# Allegro board MOTOR_SENSOR.brd
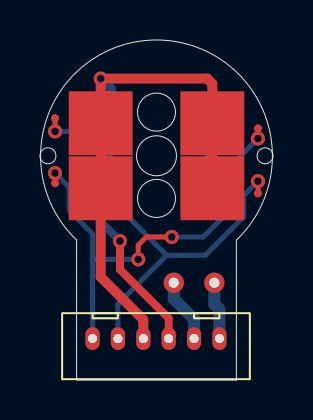
[diagram p0: board, top side]
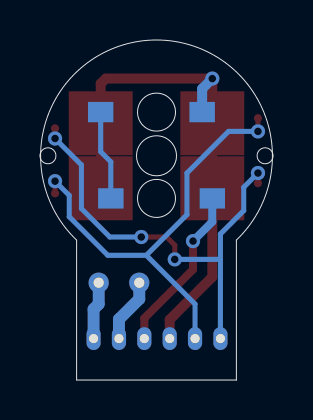
[diagram p1: board, bottom side, seen from below]

Outline 11.67 x 17.01 mm; copper layers: TOP, BOTTOM. Coordinates in mm from the lower left corner of the outline.
Outline path: circle c0.4,11.22 r0.4 ; circle c5.84,11.22 r1 ; circle c11.27,11.22 r0.4 ; 1.84,7 1.84,0 9.84,0 9.84,7 arc(5.84,17.01) 1.84,7

## Placement (name value [footprint] x y rotation side)
D1  -  [TSMF1000]  5.84 9.08 180 bottom
D2  -  [TSMF1000]  5.84 13.4 0 bottom
J1  TO_MOTOR  [SIP6_1D27Z]  2.64 2.07 0 top
J2  CON2  [SIP2_SMALL]  7.72 4.87 270 top
P1  LEFTUP  [SIPHO3_3MM]  3.04 12.84 0 top
P2  LEFTDOWN  [SIPHO3_3MM]  3.04 9.59 0 top
P3  RIGHTUP  [SIPHO3_3MM]  8.63 12.84 180 top
P4  RIGHTDOWN  [SIPHO3_3MM]  8.63 9.59 180 top

## Library data of the parts
D1 D2 = LED
J1 = CON6: User Part Number: ***
J2 = CON2
P1-P4 = PHOTODIODE

## Footprints (pads in the part's own frame, mm; a bottom-side part is the same pattern mirrored in y, then rotated)
SIP2_SMALL
  round 1.016 hole 0.508: 1(0,1.016) 2(0,-1.016)
SIP6_1D27Z
  oval 0.711x1.143 hole 0.457: 1(0,0) 2(1.27,0) 3(2.54,0) 4(3.81,0) 5(5.08,0) 6(6.35,0)
SIPHO3_3MM
  rect 3.2x3.2 smd: 1(0,0)
  round 0.406 smd: 2(-2.286,0.254)
TSMF1000
  rect 1.27x1.016 smd: 1(-2.286,0) 2(2.794,0)

## Nets
GND: D2.1(CATHODE) J1.3 P1.1(CATHODE) P2.1(CATHODE) P3.1(CATHODE) P4.1(CATHODE)
LED_POS: D1.2(ANODE) J1.4
M_DRV1: J1.5 J2.2
M_DRV2: J1.6 J2.1
M_POS1: J1.2 P1.2(ANODE) P4.2(ANODE)
M_POS2: J1.1 P2.2(ANODE) P3.2(ANODE)
N137308: D1.1(CATHODE) D2.2(ANODE)

## Via types
v1: diameter 0.711, hole 0.381, TOP to BOTTOM, 8 vias

## Routing (per net, layer and track width the routed paths; a pad name or vN(x,y) marks a point on that pad's centre or on a via; arc(x,y) is an arc through that point)
GND: length 26.7
  TOP w0.5: P4.1 P3.1 8.63,14.82 8.38,15.08 v1(3.04,15.08) P1.1 P2.1 3.04,5.15 5.18,3.02 J1.3
  BOTTOM w0.5: D2.1 3.55,14.57 v1(3.04,15.08)
LED_POS: length 8.4
  TOP w0.4: J1.4 6.45,3.09 4.01,5.53 v1(4.01,6.95)
  BOTTOM w0.4: D1.2 3.04,7.91 v1(4.01,6.95)
M_DRV1: length 3.2
  BOTTOM w0.6: J2.2 6.7,4.05 7.72,3.04 J1.5
M_DRV2: length 2.9
  BOTTOM w0.6: J2.1 8.73,3.8 8.99,3.55 J1.6
M_POS1: length 22.6
  TOP w0.254: P1.2 v1(0.76,12.44) ; P4.2 v1(10.92,9.95)
  BOTTOM w0.254: 6.34,6.24 4.31,8.27 4.31,10.35 2.23,12.44 v1(0.76,12.44) ; 6.34,6.24 3.91,3.8 J1.2 ; 6.34,6.24 8.27,6.24 10.2,8.17 10.2,9.24 v1(10.92,9.95)
M_POS2: length 22.6
  TOP w0.254: v1(6.6,7.15) 5.33,7.15 4.92,6.75 v1(4.92,6.03) ; P3.2 v1(10.92,12.08) ; P2.2 v1(0.76,10.35)
  BOTTOM w0.254: 2.64,6.03 2.64,7.3 1.47,8.47 1.47,9.64 v1(0.76,10.35) ; 2.64,6.03 v1(4.92,6.03) ; 2.64,6.03 J1.1 ; v1(6.6,7.15) 8.17,7.15 9.59,8.57 9.59,10.76 v1(10.92,12.08)
N137308: length 4.5
  BOTTOM w0.254: D1.1 8.12,10.91 8.63,11.42 D2.2
